# EAGLE board vw-lightcontrol-fail (EAGLE 6.5.0)

Size 100 x 76.19 mm. Coordinates in mm from the lower left corner, seen from the top.
Outline: 0,0 100,0 100,76.19 0,76.19 0,0
Copper layers (1*16): Top 0.035mm / dielectric 1.5mm / Bottom 0.035mm
Design rules "default": minimum track width 10mil, minimum drill 24mil, track to track 8mil, track to pad 8mil, pad to pad 8mil, via to via 8mil, smd to smd 8mil, copper to edge 40mil, drill to drill 8mil, minimum pad ring 10mil, minimum via ring 8mil, stop-mask expansion 4mil, vias tented up to drill 0mil, thermal gap 10mil

## Footprints (pad centres in the part's own frame; a part is rotated, then mirrored left to right if it is on the bottom)
C2.5-4 = drill 0.813 pad 1.6 octagon: 1 -1.27,0; 2 1.27,0
E2,5-6E = drill 0.813 pad 1.575: + -1.27,0 | drill 0.813 pad 1.575 octagon: - 1.27,0
LSP10 = drill 1.016 pad 2.159 octagon: MP 0,0
DIL16 = drill 0.813 long: 1 -8.89,-3.81; 2 -6.35,-3.81; 3 -3.81,-3.81; 4 -1.27,-3.81; 5 1.27,-3.81; 6 3.81,-3.81; 7 6.35,-3.81; 8 8.89,-3.81; 9 8.89,3.81; 10 6.35,3.81; 11 3.81,3.81; 12 1.27,3.81; 13 -1.27,3.81; 14 -3.81,3.81; 15 -6.35,3.81; 16 -8.89,3.81
TO92 = drill 0.813 octagon: 1 -1.27,0; 2 0,1.905; 3 1.27,0
LED3MM = drill 0.813 octagon: A -1.27,0; K 1.27,0
TO220 = drill 1.118 long: 1 -2.54,-6.35; 2 0,-6.35; 3 2.54,-6.35 | hole 3.302: 0,11.176
0207/10 = drill 0.813 octagon: 1 -5.08,0; 2 5.08,0
MA03-2 = drill 1.016: 1 -2.54,-1.27 | drill 1.016 octagon: 2 -2.54,1.27; 3 0,-1.27; 4 0,1.27; 5 2.54,-1.27; 6 2.54,1.27
DIP254P762X457-28 = drill 1.118 square: 1 -7.62,33.02 | drill 1.118: 2 -7.62,30.48; 3 -7.62,27.94; 4 -7.62,25.4; 5 -7.62,22.86; 6 -7.62,20.32; 7 -7.62,17.78; 8 -7.62,15.24; 9 -7.62,12.7; 10 -7.62,10.16; 11 -7.62,7.62; 12 -7.62,5.08; 13 -7.62,2.54; 14 -7.62,0; 15 0,0; 16 0,2.54; 17 0,5.08; 18 0,7.62; 19 0,10.16; 20 0,12.7; 21 0,15.24; 22 0,17.78; 23 0,20.32; 24 0,22.86; 25 0,25.4; 26 0,27.94; 27 0,30.48; 28 0,33.02

## Placement (x,y rotation side)
C1  100n  [C2.5-4]  54.61,15.24 0 top
C2  100u  [E2,5-6E]  46.99,10.16 0 top
C3  100n  [C2.5-4]  3.81,15.24 0 top
C4  100n  [C2.5-4]  2.54,3.81 0 top
C7  100u  [E2,5-6E]  45.72,3.81 0 top
CLOCK  LSP10  [LSP10]  78.74,44.45 0 top
DATA  LSP10  [LSP10]  2.54,72.39 0 top
IC1  74HC595N  [DIL16]  68.58,25.4 180 top
IC2  7805L  [TO92]  96.52,3.81 0 top
LATCH  LSP10  [LSP10]  24.13,55.88 0 top
LED1  [LED3MM]  3.81,62.23 0 top
LED2  [LED3MM]  53.34,46.99 180 top
LED3  [LED3MM]  45.72,59.69 0 top
LED4  [LED3MM]  60.96,60.96 0 top
LED5  [LED3MM]  25.4,52.07 0 top
LED6  [LED3MM]  5.08,46.99 0 top
LED7  [LED3MM]  67.31,43.18 0 top
LED8  [LED3MM]  69.85,54.61 0 top
LSP1  LSP10  [LSP10]  88.9,44.45 0 top
LSP2  LSP10  [LSP10]  43.18,68.58 0 top
LSP3  LSP10  [LSP10]  72.39,46.99 0 top
LSP4  LSP10  [LSP10]  46.99,52.07 0 top
LSP5  LSP10  [LSP10]  63.5,66.04 0 top
LSP6  LSP10  [LSP10]  26.67,69.85 0 top
LSP7  LSP10  [LSP10]  22.86,68.58 0 top
LSP8  LSP10  [LSP10]  66.04,68.58 0 top
LSP9  LSP10  [LSP10]  17.78,73.66 0 top
LSP10  LSP10  [LSP10]  25.4,43.18 0 top
LSP11  LSP10  [LSP10]  33.02,71.12 0 top
LSP12  LSP10  [LSP10]  10.16,57.15 0 top
LSP13  LSP10  [LSP10]  39.37,71.12 0 top
LSP14  LSP10  [LSP10]  19.05,73.66 0 top
LSP15  LSP10  [LSP10]  69.85,57.15 0 top
LSP16  LSP10  [LSP10]  69.85,72.39 0 top
Q1  BUZ10  [TO220]  10.16,77.47 0 top
Q2  BUZ10  [TO220]  52.07,58.42 0 top
Q3  BUZ10  [TO220]  78.74,57.15 0 top
Q4  BUZ10  [TO220]  90.17,57.15 0 top
Q5  BUZ10  [TO220]  15.24,11.43 0 top
Q6  BUZ10  [TO220]  26.67,17.78 0 top
Q7  BUZ10  [TO220]  38.1,10.16 0 top
Q8  BUZ10  [TO220]  5.08,26.67 0 top
R1  330  [0207/10]  44.45,26.67 0 top
R2  330  [0207/10]  43.18,30.48 0 top
R3  27k  [0207/10]  33.02,50.8 0 top
R4  640  [0207/10]  13.97,59.69 0 top
R5  10k  [0207/10]  88.9,24.13 0 top
R6  27k  [0207/10]  88.9,30.48 0 top
R7  640  [0207/10]  58.42,52.07 90 top
R8  330  [0207/10]  44.45,34.29 0 top
R9  27k  [0207/10]  34.29,54.61 0 top
R10  640  [0207/10]  8.89,67.31 0 top
R11  330  [0207/10]  88.9,40.64 0 top
R12  27k  [0207/10]  41.91,45.72 0 top
R13  640  [0207/10]  72.39,36.83 0 top
R14  330  [0207/10]  16.51,44.45 0 top
R15  27k  [0207/10]  35.56,59.69 0 top
R16  640  [0207/10]  11.43,55.88 0 top
R17  330  [0207/10]  86.36,34.29 0 top
R18  27k  [0207/10]  30.48,69.85 0 top
R19  640  [0207/10]  21.59,38.1 0 top
R20  330  [0207/10]  30.48,41.91 90 top
R21  27k  [0207/10]  34.29,63.5 0 top
R22  640  [0207/10]  13.97,50.8 0 top
R23  330  [0207/10]  55.88,40.64 0 top
R24  27k  [0207/10]  21.59,62.23 0 top
R25  640  [0207/10]  19.05,66.04 0 top
SV1  [MA03-2]  35.56,6.35 0 top
U1  ATMEGA168A-PU  [DIP254P762X457-28]  91.44,12.7 90 top
VCC5V  LSP10  [LSP10]  21.59,52.07 0 top

## Library data of the parts
C1 C3 C4 = capacitor-wima
C2 C7 R1-R4 R6-R25 = rcl
CLOCK DATA LATCH LSP1-LSP16 VCC5V = solpad
IC1 = 74xx-eu
IC2 = linear
LED1-LED8 = led
Q1-Q8 = transistor-fet
R5 = resistor
SV1 = con-lstb; OC_FARNELL: unknown; OC_NEWARK: unknown
U1 = Atmel_By_element14_Batch_1; DESCRIPTION: MCU; MPN: ATMEGA168A-PU; OC_FARNELL: 1841605; OC_NEWARK: 12T1297; PACKAGE: DIP-28; SUPPLIER: Atmel

## Nets
AVCC: U1.20
GND: C2.- C3.1 C4.1 IC1.13 IC2.2 Q1.3 Q2.3 Q3.3 Q4.3 Q5.3 Q6.3 Q7.3 Q8.3 R3.1 R6.1 R9.1 R12.1 R15.1 R18.1 R21.1 R24.1 SV1.6 U1.22
N$1: LED1.A R4.1
N$2: Q1.1 R1.2 R3.2
N$3: LED1.K LSP9.MP Q1.2
N$4: IC1.15 R1.1
N$5: LED2.A R7.1
N$6: C1.2
N$7: C2.+ C4.2 C7.+ IC1.10 IC2.1 R5.1 U1.7 VCC5V.MP
N$8: Q2.1 R2.2 R6.2
N$9: LED2.K LSP3.MP Q2.2
N$10: IC1.1 R2.1
N$11: LED3.A R10.1
N$12: Q3.1 R8.2 R9.2
N$13: LED3.K LSP5.MP Q3.2
N$14: IC1.2 R8.1
N$15: LED4.A R13.1
N$16: Q4.1 R11.2 R12.2
N$17: LED4.K LSP7.MP Q4.2
N$18: IC1.3 R11.1
N$19: LED5.A R16.1
N$20: R5.2 SV1.5 U1.1
N$21: Q5.1 R14.2 R15.2
N$22: DATA.MP IC1.14 SV1.4 U1.17
N$23: SV1.1 U1.18
N$24: LED5.K LSP10.MP Q5.2
N$25: IC1.7 R14.1
N$26: LED6.A R19.1
N$27: Q6.1 R17.2 R18.2
N$28: LED6.K LSP12.MP Q6.2
N$29: IC1.6 R17.1
N$30: LED7.A R22.1
N$31: Q7.1 R20.2 R21.2
N$32: LED7.K LSP14.MP Q7.2
N$33: IC1.5 R20.1
N$34: LED8.A R25.1
N$35: Q8.1 R23.2 R24.2
N$36: LED8.K LSP16.MP Q8.2
N$37: IC1.4 R23.1
N$102: CLOCK.MP IC1.11 SV1.3 U1.19
N$104: C1.1 C7.- IC1.8
N$110: IC1.12 LATCH.MP U1.15
VCC: IC1.16 IC2.3 LSP1.MP LSP2.MP LSP4.MP LSP6.MP LSP8.MP LSP11.MP LSP13.MP LSP15.MP R4.2 R7.2 R10.2 R13.2 R16.2 R19.2 R22.2 R25.2 SV1.2

## Tracks (layer width: path | path; a pad name or v marks a point on that pad's centre or on a via)
GND  (22 unrouted)
N$1  (1 unrouted)
N$2  (2 unrouted)
N$3  (2 unrouted)
N$4  (1 unrouted)
N$5  (1 unrouted)
N$7  (7 unrouted)
N$8  (2 unrouted)
N$9  (2 unrouted)
N$10  (1 unrouted)
N$11  (1 unrouted)
N$12  (2 unrouted)
N$13  (2 unrouted)
N$14  (1 unrouted)
N$15  (1 unrouted)
N$16  (2 unrouted)
N$17  (2 unrouted)
N$18  (1 unrouted)
N$19  (1 unrouted)
N$20  (2 unrouted)
N$21  (2 unrouted)
N$22  (3 unrouted)
N$23  (1 unrouted)
N$24  (2 unrouted)
N$25  (1 unrouted)
N$26  (1 unrouted)
N$27  (2 unrouted)
N$28  (2 unrouted)
N$29  (1 unrouted)
N$30  (1 unrouted)
N$31  (2 unrouted)
N$32  (2 unrouted)
N$33  (1 unrouted)
N$34  (1 unrouted)
N$35  (2 unrouted)
N$36  (2 unrouted)
N$37  (1 unrouted)
N$102  (3 unrouted)
N$104  (2 unrouted)
N$110  (2 unrouted)
VCC  (18 unrouted)